# Altium PCB PowerBoard.PcbDoc (part 1 of 2)
Units mm, origin at the board's own origin, x right, y up, seen from the top; angles counter-clockwise.
Board outline 106.25 x 146.25 mm, 4 copper layers (Top Layer, Signal Layer 1, Signal Layer 2, Bottom Layer), stack 2.22 mm thick; 73 components, 20 nets, 353 pads, 2185 vias.
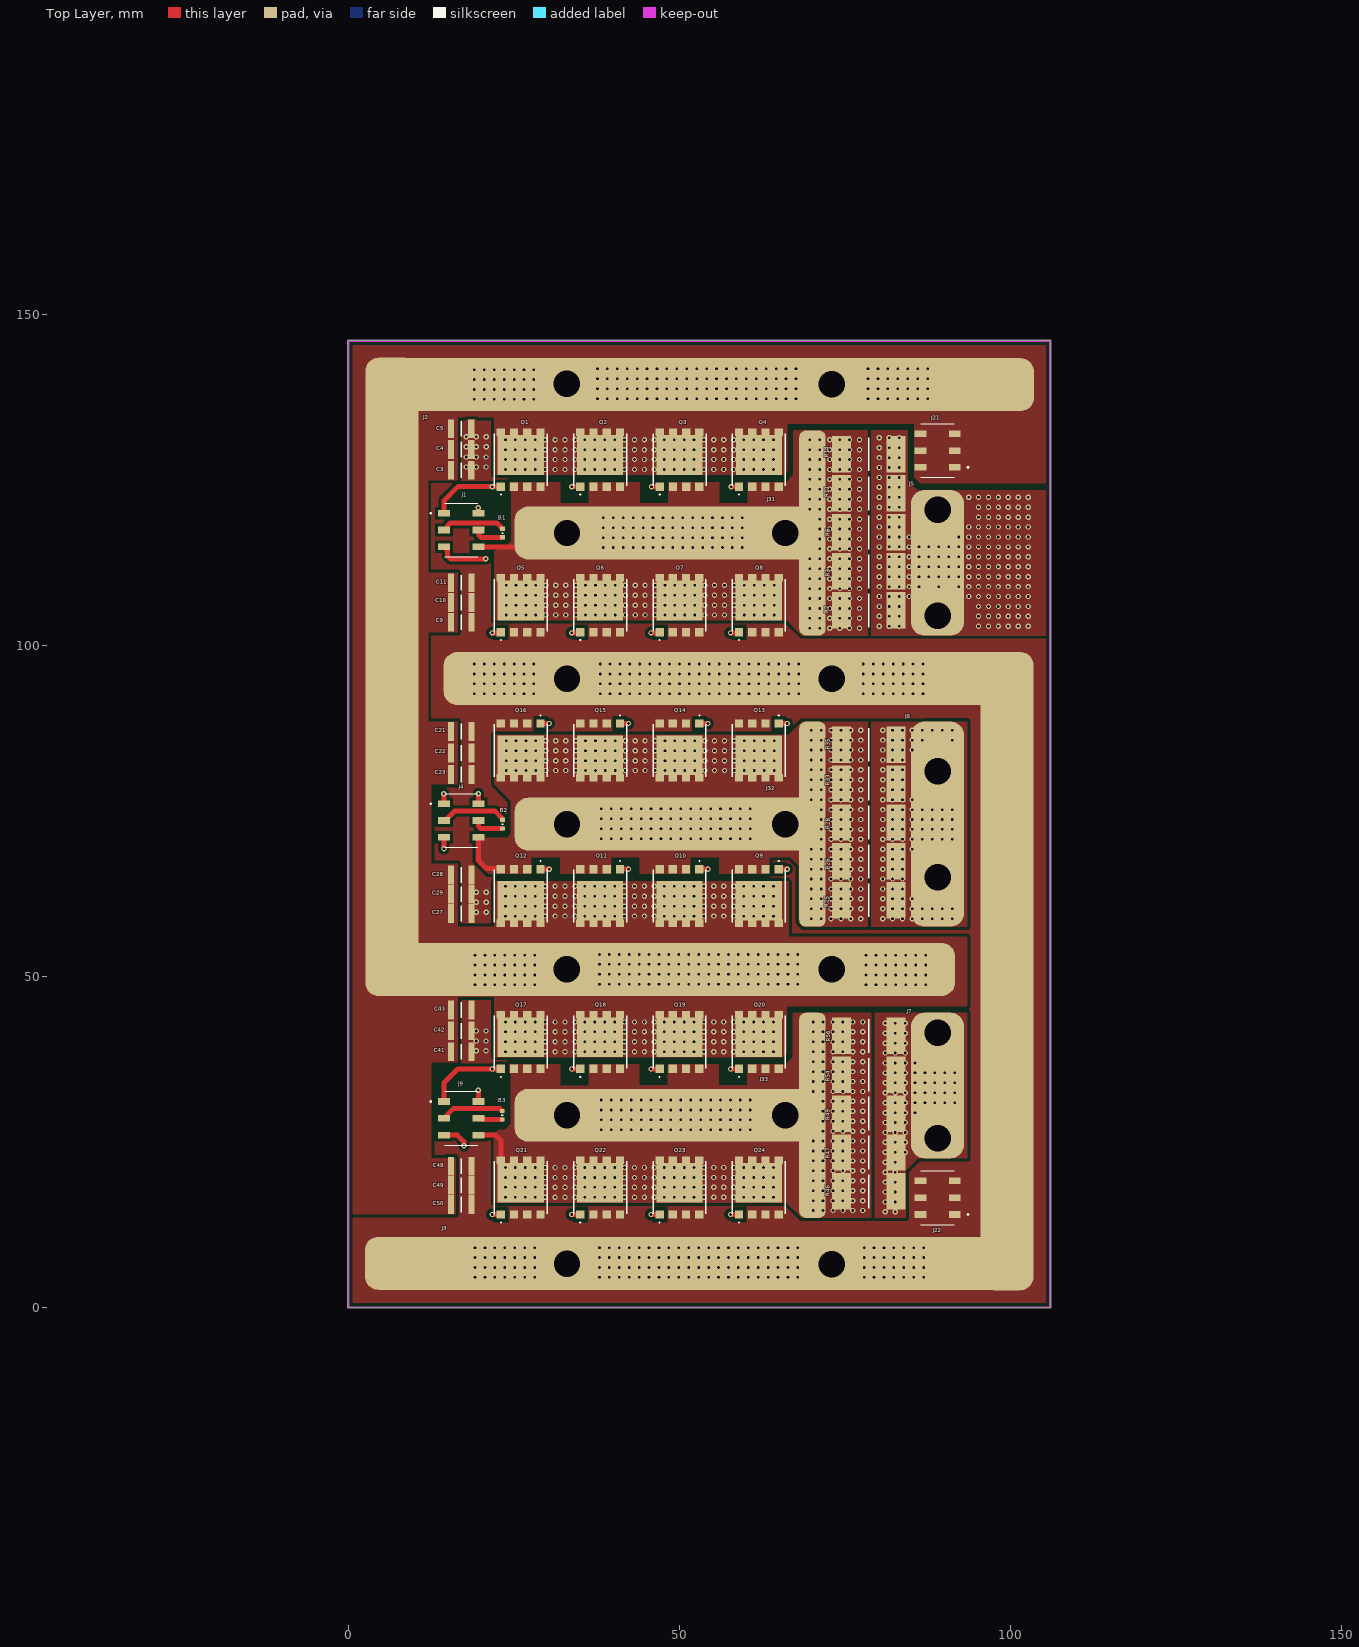
[diagram p0: Top Layer view]
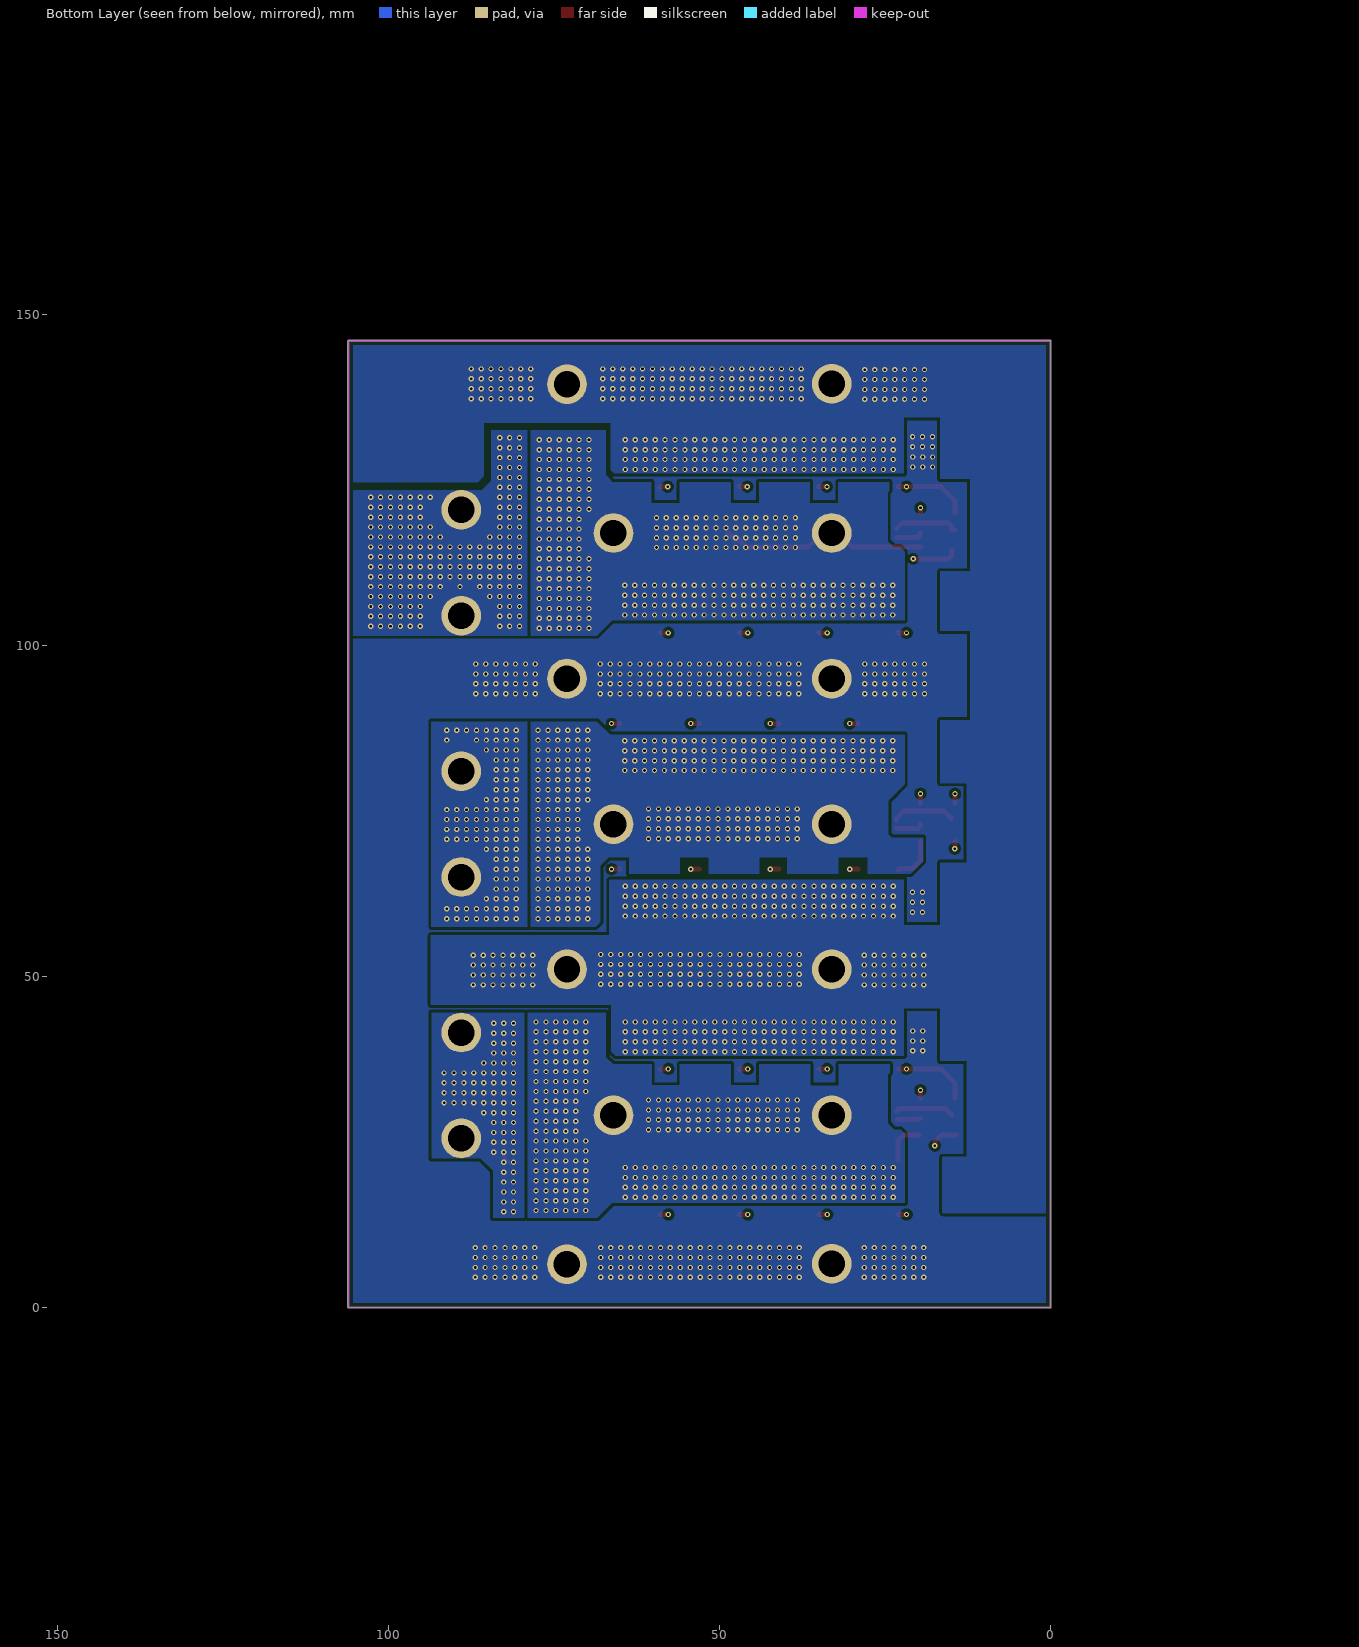
[diagram p1: Bottom Layer view, seen from below]
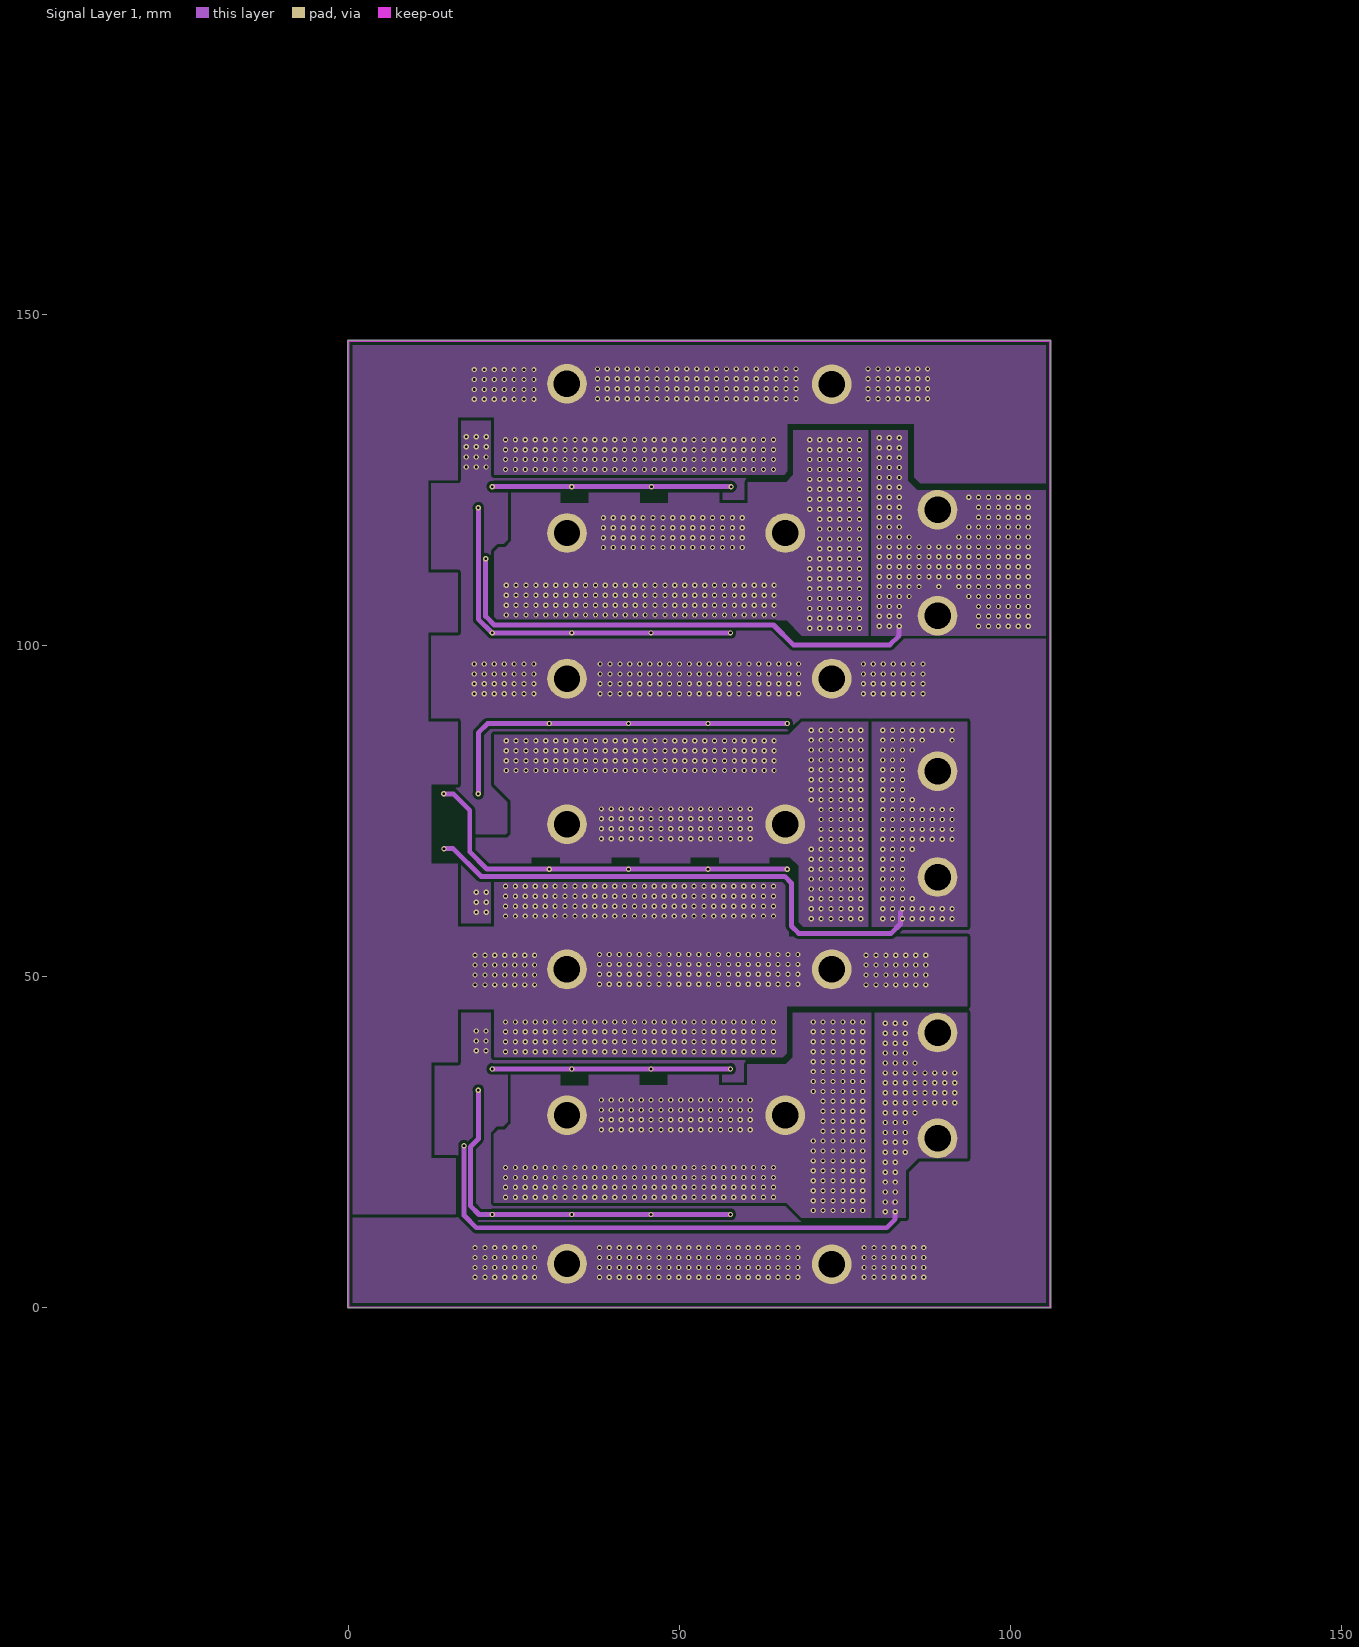
[diagram p2: Signal Layer 1]
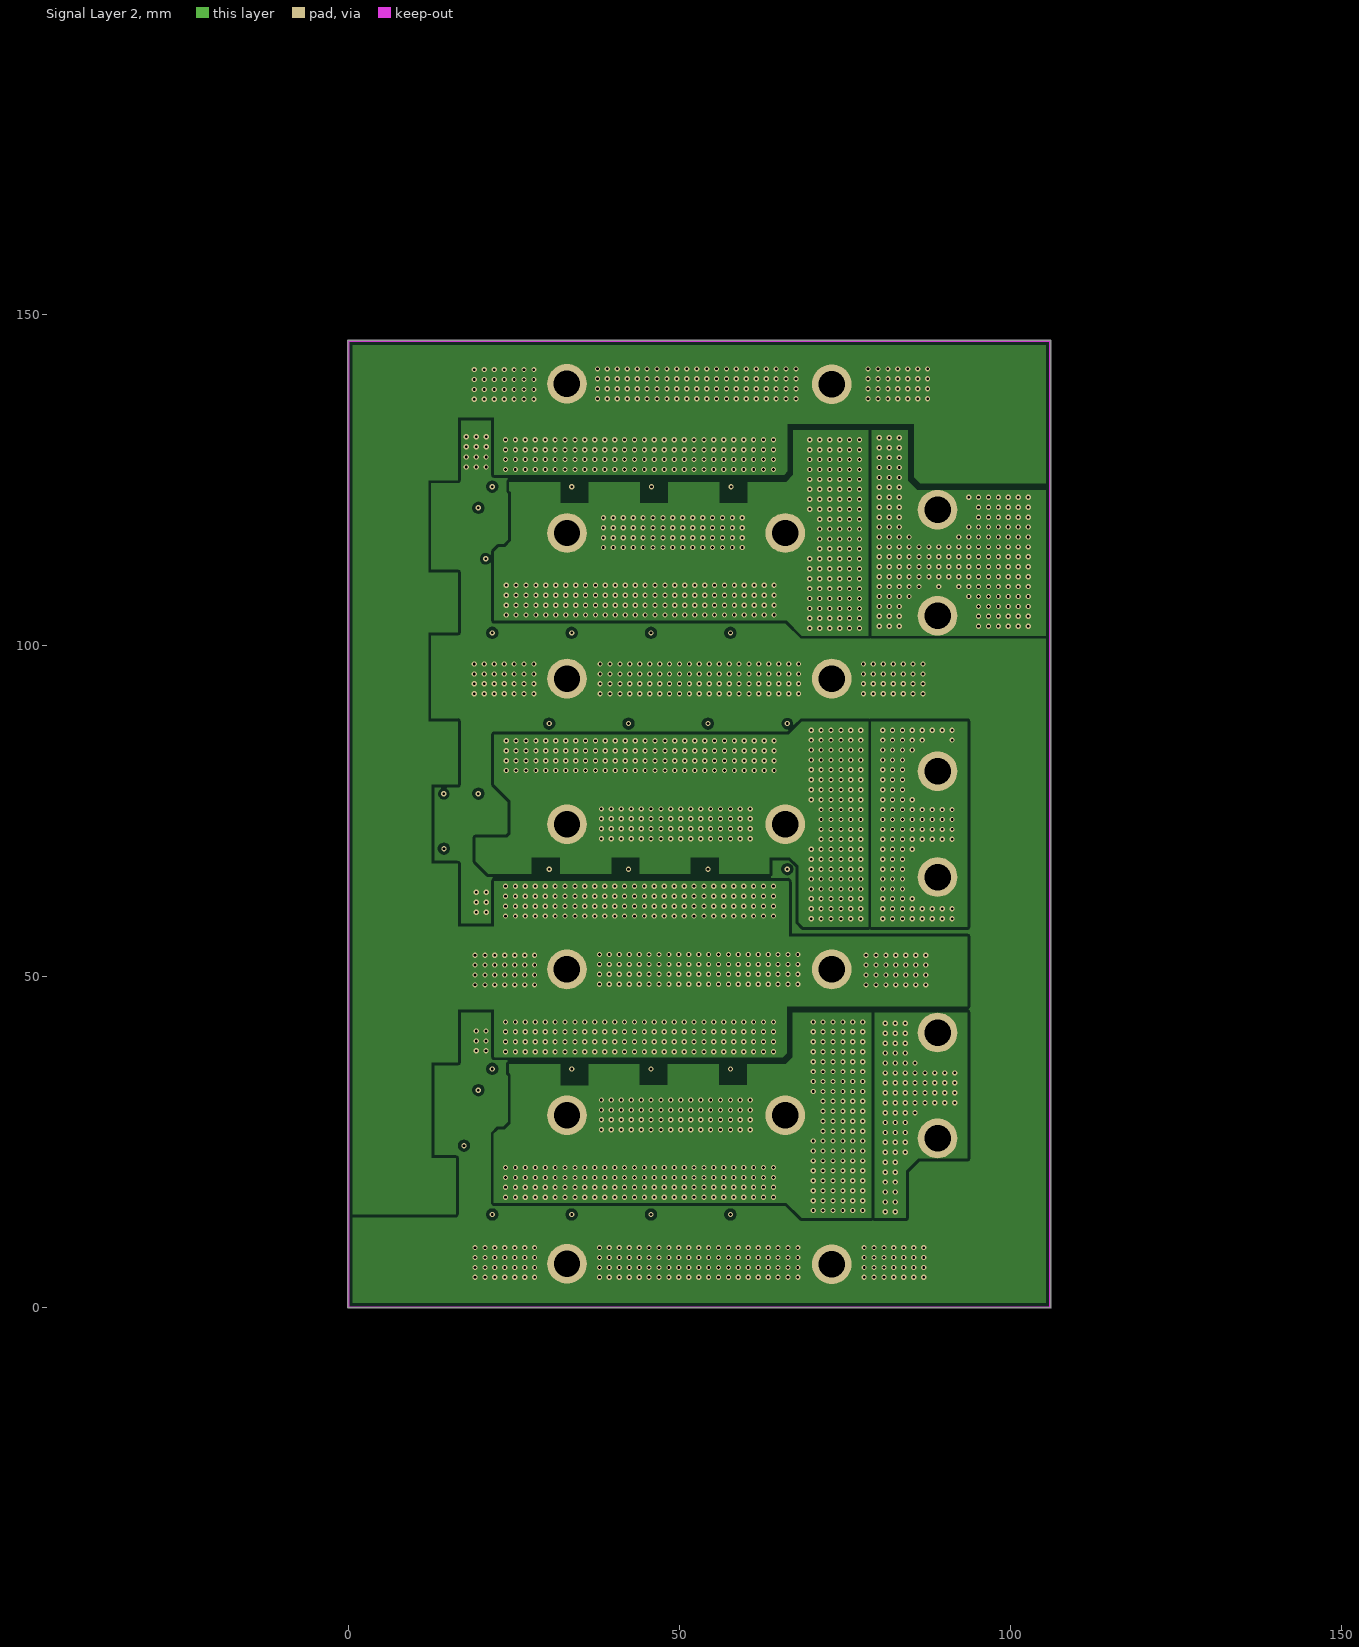
[diagram p3: Signal Layer 2]
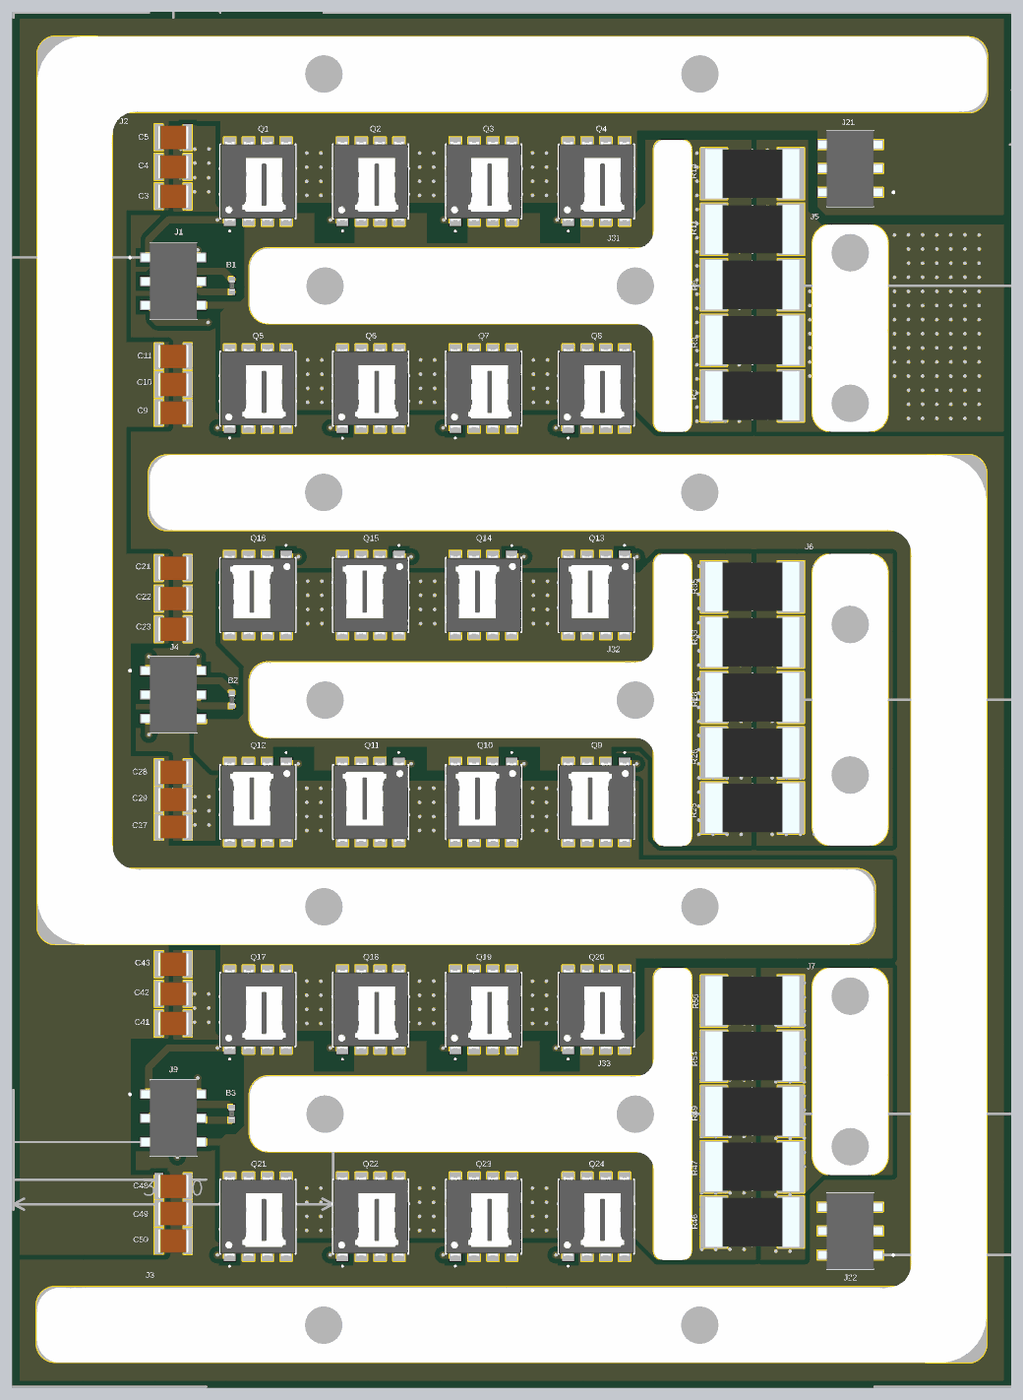
[diagram p5: 3D render of the assembled board from above, using the file's embedded part models]

## Layer stack, top to bottom
Top Solder: solder mask 0.025, Solder Resist, Dk 3.5
Top Layer: signal copper 0.07
Dielectric 2: core 0.254, Dk 4.2
Signal Layer 1: signal copper 0.036
Dielectric 4: core 1.5, Dk 4.2
Signal Layer 2: signal copper 0.036
Dielectric 3: core 0.254, Dk 4.2
Bottom Layer: signal copper 0.07
Bottom Solder: solder mask 0.025, Solder Resist, Dk 3.5

## Board outline
0,-0.127 cw(c0,0) -0.127,0 -0.127,146 cw(c0,146) 0,146.127 106,146.127 cw(c106,146) 106.127,146 106.127,145.998 ccw(c106,146) 106.127,146 106.127,145.998 106.127,0 cw(c106,0) 106,-0.127

## Design rules (kind name [scope] priority, off if disabled: settings)
AssemblyTestPointUsage AssemblyTestPointUsage_1 [All] p2:
AssemblyTestpoint AssemblyTestpoint_1 [All] p1: testpointundercomponent=TRUE minsize=1.016 maxsize=2.54 preferedsize=1.524 minholesize=0 maxholesize=1.016 preferedholesize=0.813 testpointgrid=0.025 usegrid=TRUE gridtolerance=0 allowsidetop=TRUE allowsidebottom=TRUE
Clearance Clearance_1 [All] p1: gap=0.5 ignorepadtopadclearanceinfootprint=FALSE except(0: Arc-Hole Track-Hole SMDPad-Hole THPad-Hole Via-Hole Fill-Hole Poly-Hole Region-Hole Text-Hole; 0.2: Arc-Arc Arc-Track Arc-SMDPad Arc-THPad Arc-Via Track-Track Track-SMDPad Track-THPad Track-Via SMDPad-SMDPad SMDPad-THPad SMDPad-Via THPad-THPad THPad-Via Via-Via)
ComponentClearance ComponentClearance_1 [All] p1: gap=0.2 collisioncheckmode=3 verticalgap=0.2 showdistances=TRUE
DiffPairsRouting DiffPairsRouting_1 [All] p1: maxlimit=0.254 minlimit=0.254 mostfreqgap=0.254 substack1={0391787D-B3DB-4B16-B312-97C439599AB4} toplayer_{0391787d-b3db-4b16-b312-97c439599ab4}_minwidth=0.381 toplayer_{0391787d-b3db-4b16-b312-97c439599ab4}_maxwidth=0.381 toplayer_{0391787d-b3db-4b16-b312-97c439599ab4}_prefwidth=0.381 midlayer1_{0391787d-b3db-4b16-b312-97c439599ab4}_minwidth=0.381 midlayer1_{0391787d-b3db-4b16-b312-97c439599ab4}_maxwidth=0.381 midlayer1_{0391787d-b3db-4b16-b312-97c439599ab4}_prefwidth=0.381 midlayer2_{0391787d-b3db-4b16-b312-97c439599ab4}_minwidth=0.381 midlayer2_{0391787d-b3db-4b16-b312-97c439599ab4}_maxwidth=0.381 midlayer2_{0391787d-b3db-4b16-b312-97c439599ab4}_prefwidth=0.381 bottomlayer_{0391787d-b3db-4b16-b312-97c439599ab4}_minwidth=0.381 bottomlayer_{0391787d-b3db-4b16-b312-97c439599ab4}_maxwidth=0.381 bottomlayer_{0391787d-b3db-4b16-b312-97c439599ab4}_prefwidth=0.381 substack2={0E55BCC6-0461-4BB8-A6DB-68FAAC3CF03A} toplayer_{0e55bcc6-0461-4bb8-a6db-68faac3cf03a}_minwidth=0.381 toplayer_{0e55bcc6-0461-4bb8-a6db-68faac3cf03a}_maxwidth=0.381 toplayer_{0e55bcc6-0461-4bb8-a6db-68faac3cf03a}_prefwidth=0.381 midlayer1_{0e55bcc6-0461-4bb8-a6db-68faac3cf03a}_minwidth=0.381 midlayer1_{0e55bcc6-0461-4bb8-a6db-68faac3cf03a}_maxwidth=0.381 midlayer1_{0e55bcc6-0461-4bb8-a6db-68faac3cf03a}_prefwidth=0.381 midlayer2_{0e55bcc6-0461-4bb8-a6db-68faac3cf03a}_minwidth=0.381 midlayer2_{0e55bcc6-0461-4bb8-a6db-68faac3cf03a}_maxwidth=0.381 midlayer2_{0e55bcc6-0461-4bb8-a6db-68faac3cf03a}_prefwidth=0.381 bottomlayer_{0e55bcc6-0461-4bb8-a6db-68faac3cf03a}_minwidth=0.381 bottomlayer_{0e55bcc6-0461-4bb8-a6db-68faac3cf03a}_maxwidth=0.381 bottomlayer_{0e55bcc6-0461-4bb8-a6db-68faac3cf03a}_prefwidth=0.381 substack3={7F91D735-8F98-4998-8FBE-C2B075826548} toplayer_{7f91d735-8f98-4998-8fbe-c2b075826548}_minwidth=0.381 toplayer_{7f91d735-8f98-4998-8fbe-c2b075826548}_maxwidth=0.381 toplayer_{7f91d735-8f98-4998-8fbe-c2b075826548}_prefwidth=0.381 midlayer1_{7f91d735-8f98-4998-8fbe-c2b075826548}_minwidth=0.381 midlayer1_{7f91d735-8f98-4998-8fbe-c2b075826548}_maxwidth=0.381 midlayer1_{7f91d735-8f98-4998-8fbe-c2b075826548}_prefwidth=0.381 midlayer2_{7f91d735-8f98-4998-8fbe-c2b075826548}_minwidth=0.381 midlayer2_{7f91d735-8f98-4998-8fbe-c2b075826548}_maxwidth=0.381 midlayer2_{7f91d735-8f98-4998-8fbe-c2b075826548}_prefwidth=0.381 bottomlayer_{7f91d735-8f98-4998-8fbe-c2b075826548}_minwidth=0.381 bottomlayer_{7f91d735-8f98-4998-8fbe-c2b075826548}_maxwidth=0.381 bottomlayer_{7f91d735-8f98-4998-8fbe-c2b075826548}_prefwidth=0.381 substack4={4ED4D01E-40BF-4D50-BA5A-F23A5EC9E761} toplayer_{4ed4d01e-40bf-4d50-ba5a-f23a5ec9e761}_minwidth=0.381 toplayer_{4ed4d01e-40bf-4d50-ba5a-f23a5ec9e761}_maxwidth=0.381 toplayer_{4ed4d01e-40bf-4d50-ba5a-f23a5ec9e761}_prefwidth=0.381 midlayer1_{4ed4d01e-40bf-4d50-ba5a-f23a5ec9e761}_minwidth=0.381 midlayer1_{4ed4d01e-40bf-4d50-ba5a-f23a5ec9e761}_maxwidth=0.381 midlayer1_{4ed4d01e-40bf-4d50-ba5a-f23a5ec9e761}_prefwidth=0.381 midlayer2_{4ed4d01e-40bf-4d50-ba5a-f23a5ec9e761}_minwidth=0.381 midlayer2_{4ed4d01e-40bf-4d50-ba5a-f23a5ec9e761}_maxwidth=0.381 midlayer2_{4ed4d01e-40bf-4d50-ba5a-f23a5ec9e761}_prefwidth=0.381 bottomlayer_{4ed4d01e-40bf-4d50-ba5a-f23a5ec9e761}_minwidth=0.381 bottomlayer_{4ed4d01e-40bf-4d50-ba5a-f23a5ec9e761}_maxwidth=0.381 bottomlayer_{4ed4d01e-40bf-4d50-ba5a-f23a5ec9e761}_prefwidth=0.381 substack5={57BA5FAC-A096-47A8-A9C3-28502E285703} toplayer_{57ba5fac-a096-47a8-a9c3-28502e285703}_minwidth=0.381 toplayer_{57ba5fac-a096-47a8-a9c3-28502e285703}_maxwidth=0.381 toplayer_{57ba5fac-a096-47a8-a9c3-28502e285703}_prefwidth=0.381 midlayer1_{57ba5fac-a096-47a8-a9c3-28502e285703}_minwidth=0.381 midlayer1_{57ba5fac-a096-47a8-a9c3-28502e285703}_maxwidth=0.381 midlayer1_{57ba5fac-a096-47a8-a9c3-28502e285703}_prefwidth=0.381 midlayer2_{57ba5fac-a096-47a8-a9c3-28502e285703}_minwidth=0.381 midlayer2_{57ba5fac-a096-47a8-a9c3-28502e285703}_maxwidth=0.381 midlayer2_{57ba5fac-a096-47a8-a9c3-28502e285703}_prefwidth=0.381 bottomlayer_{57ba5fac-a096-47a8-a9c3-28502e285703}_minwidth=0.381 bottomlayer_{57ba5fac-a096-47a8-a9c3-28502e285703}_maxwidth=0.381 bottomlayer_{57ba5fac-a096-47a8-a9c3-28502e285703}_prefwidth=0.381 toplayer_minwidth=0.381 toplayer_maxwidth=0.381 toplayer_prefwidth=0.381 midlayer1_minwidth=0.381 midlayer1_maxwidth=0.381 midlayer1_prefwidth=0.381 midlayer2_minwidth=0.381 midlayer2_maxwidth=0.381 midlayer2_prefwidth=0.381 bottomlayer_minwidth=0.381 bottomlayer_maxwidth=0.381 bottomlayer_prefwidth=0.381 substack6={B351C19E-D50C-4F2F-B5BB-791B69F230FF} toplayer_{b351c19e-d50c-4f2f-b5bb-791b69f230ff}_minwidth=0.381 toplayer_{b351c19e-d50c-4f2f-b5bb-791b69f230ff}_maxwidth=0.381 toplayer_{b351c19e-d50c-4f2f-b5bb-791b69f230ff}_prefwidth=0.381 midlayer1_{b351c19e-d50c-4f2f-b5bb-791b69f230ff}_minwidth=0.381 midlayer1_{b351c19e-d50c-4f2f-b5bb-791b69f230ff}_maxwidth=0.381 midlayer1_{b351c19e-d50c-4f2f-b5bb-791b69f230ff}_prefwidth=0.381 midlayer2_{b351c19e-d50c-4f2f-b5bb-791b69f230ff}_minwidth=0.381 midlayer2_{b351c19e-d50c-4f2f-b5bb-791b69f230ff}_maxwidth=0.381 midlayer2_{b351c19e-d50c-4f2f-b5bb-791b69f230ff}_prefwidth=0.381 bottomlayer_{b351c19e-d50c-4f2f-b5bb-791b69f230ff}_minwidth=0.381 bottomlayer_{b351c19e-d50c-4f2f-b5bb-791b69f230ff}_maxwidth=0.381 bottomlayer_{b351c19e-d50c-4f2f-b5bb-791b69f230ff}_prefwidth=0.381 substack7={2F1B6B62-C7FD-47FC-965D-ED7560D8E9E8} toplayer_{2f1b6b62-c7fd-47fc-965d-ed7560d8e9e8}_minwidth=0.381 toplayer_{2f1b6b62-c7fd-47fc-965d-ed7560d8e9e8}_maxwidth=0.381 toplayer_{2f1b6b62-c7fd-47fc-965d-ed7560d8e9e8}_prefwidth=0.381 midlayer1_{2f1b6b62-c7fd-47fc-965d-ed7560d8e9e8}_minwidth=0.381 midlayer1_{2f1b6b62-c7fd-47fc-965d-ed7560d8e9e8}_maxwidth=0.381 midlayer1_{2f1b6b62-c7fd-47fc-965d-ed7560d8e9e8}_prefwidth=0.381 midlayer2_{2f1b6b62-c7fd-47fc-965d-ed7560d8e9e8}_minwidth=0.381 midlayer2_{2f1b6b62-c7fd-47fc-965d-ed7560d8e9e8}_maxwidth=0.381 midlayer2_{2f1b6b62-c7fd-47fc-965d-ed7560d8e9e8}_prefwidth=0.381 bottomlayer_{2f1b6b62-c7fd-47fc-965d-ed7560d8e9e8}_minwidth=0.381 bottomlayer_{2f1b6b62-c7fd-47fc-965d-ed7560d8e9e8}_maxwidth=0.381 bottomlayer_{2f1b6b62-c7fd-47fc-965d-ed7560d8e9e8}_prefwidth=0.381 substack8={A0CE5E7A-17C9-422A-884C-87F0A86ADDD9} toplayer_{a0ce5e7a-17c9-422a-884c-87f0a86addd9}_minwidth=0.381 toplayer_{a0ce5e7a-17c9-422a-884c-87f0a86addd9}_maxwidth=0.381 toplayer_{a0ce5e7a-17c9-422a-884c-87f0a86addd9}_prefwidth=0.381 midlayer1_{a0ce5e7a-17c9-422a-884c-87f0a86addd9}_minwidth=0.381 midlayer1_{a0ce5e7a-17c9-422a-884c-87f0a86addd9}_maxwidth=0.381 midlayer1_{a0ce5e7a-17c9-422a-884c-87f0a86addd9}_prefwidth=0.381 midlayer2_{a0ce5e7a-17c9-422a-884c-87f0a86addd9}_minwidth=0.381 midlayer2_{a0ce5e7a-17c9-422a-884c-87f0a86addd9}_maxwidth=0.381 midlayer2_{a0ce5e7a-17c9-422a-884c-87f0a86addd9}_prefwidth=0.381 bottomlayer_{a0ce5e7a-17c9-422a-884c-87f0a86addd9}_minwidth=0.381 bottomlayer_{a0ce5e7a-17c9-422a-884c-87f0a86addd9}_maxwidth=0.381 bottomlayer_{a0ce5e7a-17c9-422a-884c-87f0a86addd9}_prefwidth=0.381 maxuncoupledlength=12.7
FabricationTestPointUsage FabricationTestPointUsage_1 [All] p1: valid=0 allowmultiple=FALSE
FabricationTestpoint FabricationTestpoint_1 [All] p1: side=3 testpointundercomponent=TRUE minsize=1.016 maxsize=2.54 preferedsize=1.524 minholesize=0 maxholesize=1.016 preferedholesize=0.813 testpointgrid=0.025 allowsidetop=TRUE allowsidebottom=TRUE usegrid=TRUE gridtolerance=0
FanoutControl Fanout_BGA_1 [IsBGA] p1: bgadir=Out bgaviamode=Centered fanoutstyle=Auto fanoutdirection=Alternating viagrid=0.025 // Fanout_BGA (Default Rule)
FanoutControl Fanout_LCC_1 [IsLCC] p2: bgadir=Out bgaviamode=Centered fanoutstyle=Auto fanoutdirection=Alternating viagrid=0.025 // Fanout_LCC (Default Rule)
FanoutControl Fanout_SOIC_1 [IsSOIC] p3: bgadir=Out bgaviamode=Centered fanoutstyle=Auto fanoutdirection=Alternating viagrid=0.025 // Fanout_SOIC (Default Rule)
FanoutControl Fanout_Small_1 [(CompPinCount < 5)] p4: bgadir=Out bgaviamode=Centered fanoutstyle=Auto fanoutdirection=OutThenIn viagrid=0.025 // Fanout_Small (Default Rule)
FanoutControl Fanout_Default_1 [All] p5: bgadir=Out bgaviamode=Centered fanoutstyle=Auto fanoutdirection=Alternating viagrid=0.025 // Fanout_Default (Default Rule)
Height Height_1 [All] p1: minheight=0 maxheight=25.4 prefheight=12.7
HoleSize HoleSize_1 [All] p1: absolutevalues=TRUE maxlimit=5 minlimit=0.3 maxpercent=80.000 minpercent=20.000
HoleToHoleClearance HoleToHoleClearance_1 [All] p1: gap=0.254 allowstackedmicrovias=TRUE
LayerPairs LayerPairs_1 [All] p1: enforce=TRUE
MinimumSolderMaskSliver MinimumSolderMaskSliver_1 [All] p1: minsoldermaskwidth=0.1
NetAntennae NetAntennae_1 [InNetClass('VIN')] p1: netantennaetolerance=0
PasteMaskExpansion PasteMaskExpansion_1 [All] p1: expansion=0
PlaneClearance PlaneClearance_1 [All] p1: clearance=0.508
PlaneConnect PlaneConnect_1 [All] p1: planeconnectstyle=Relief reliefexpansion=0.508 reliefentries=4 reliefconductorwidth=0.254 reliefairgap=0.254
PolygonConnect PolygonConnect_1 [All] p1: connectstyle=Direct reliefconductorwidth=0.254 reliefentries=4 polygonreliefangle="90 Angle" airgapwidth=0.254
RoutingCorners RoutingCorners_1 [All] p1: cornerstyle=45-Degree minsetback=2.54 maxsetback=2.54
RoutingLayers RoutingLayers_1 [All] p1: top layer_v5=TRUE mid layer 1_v5=TRUE mid layer 2_v5=TRUE bottom layer_v5=TRUE
RoutingPriority RoutingPriority_1 [All] p1: routingpriority=0
RoutingTopology RoutingTopology_1 [All] p1: topology=Shortest
RoutingVias RoutingVias_1 [All] p1: holewidth=0.4 width=0.8 viastyle="Through Hole" minholewidth=0.3 minwidth=0.6 maxholewidth=5 maxwidth=10
ShortCircuit ShortCircuit_1 [All] p1: allowed=FALSE
SilkToBoardRegionClearance SilkToBoardRegionClearance_1 [All] p2:
SilkToSilkClearance SilkToSilkClearance_1 [All] p1: silktosilkclearance=0
SilkToSolderMaskClearance SilkToSolderMaskClearance_1 [IsPad] p1: minsilkscreentomaskgap=0 clearancetoexposedcopper=TRUE
SolderMaskExpansion SolderMaskExpansion_1 [All] p1: expansion=0.102 istentingtop=FALSE
UnRoutedNet UnRoutedNet_1 [All] p1:
UnpouredPolygon UnpouredPolygon_1 [All] p1:
Width Width_1 [All] p1: maxlimit=3.048 minlimit=0.2 preferedwidth=0.254 substack1={0391787D-B3DB-4B16-B312-97C439599AB4} substack2={0E55BCC6-0461-4BB8-A6DB-68FAAC3CF03A} substack3={7F91D735-8F98-4998-8FBE-C2B075826548} substack4={4ED4D01E-40BF-4D50-BA5A-F23A5EC9E761} substack5={57BA5FAC-A096-47A8-A9C3-28502E285703} substack6={B351C19E-D50C-4F2F-B5BB-791B69F230FF} substack7={2F1B6B62-C7FD-47FC-965D-ED7560D8E9E8} substack8={A0CE5E7A-17C9-422A-884C-87F0A86ADDD9}
2 further rules are at their usual default settings.

## Components (designator, comment, footprint, x,y, rotation, side; value= is the part's Value field where it differs from the comment)
B1 "NTCS0402E3103GL1T" THRMC1005X65N 23.25,117 r270 top
B2 "NTCS0402E3103GL1T" THRMC1005X65N 23.25,73 r270 top
B3 "NTCS0402E3103GL1T" THRMC1005X65N 23.2,29 r270 top
C3 "10uF 100V" CAPC3225X230N 16.992,126.5 r180 top
C4 "10uF 100V" CAPC3225X230N 16.992,129.628 r180 top
C5 "10uF 100V" CAPC3225X230N 16.992,132.756 r180 top
C9 "10uF 100V" CAPC3225X230N 17,103.5 r0 top
C10 "10uF 100V" CAPC3225X230N 17,106.5 r0 top
C11 "10uF 100V" CAPC3225X230N 17,109.5 r0 top
C21 "10uF 100V" CAPC3225X230N 17,87 r180 top
C22 "10uF 100V" CAPC3225X230N 17,83.75 r180 top
C23 "10uF 100V" CAPC3225X230N 17,80.5 r180 top
C27 "10uF 100V" CAPC3225X230N 17,59.5 r0 top
C28 "10uF 100V" CAPC3225X230N 17,65.3 r0 top
C29 "10uF 100V" CAPC3225X230N 17,62.4 r0 top
C41 "10uF 100V" CAPC3225X230N 17,38.6 r180 top
C42 "10uF 100V" CAPC3225X230N 17,41.75 r180 top
C43 "10uF 100V" CAPC3225X230N 17,44.9 r180 top
C48 "10uF 100V" CAPC3225X230N 17,21.3 r0 top
C49 "10uF 100V" CAPC3225X230N 17,18.4 r0 top
C50 "10uF 100V" CAPC3225X230N 17,15.5 r0 top
J1 "PHASE_U" 61030621821 17,117.46 r270 top value=61030621821
J2 "74651194R" COPPER_CON1 7.52,92.75 r0 top locked
J3 "74651194R" COPPER_CON1 98.5,53.289 r180 top locked
J4 "PHASE_V" 61030621821 17,73.54 r270 top value=61030621821
J5 "74651194R" COPPER_CON2 89,112.5 r180 top locked
J6 "74651194R" COPPER_CON3 93,73 r0 top locked
J7 "74651194R" COPPER_CON2 89,33.5 r180 top locked
J9 "PHASE_W" 61030621821 17,28.54 r270 top value=61030621821
J21 "VIN+" 61030621821 89,129.46 r90 top value=61030621821
J22 "VIN-" 61030621821 89,16.54 r90 top value=61030621821
J31 "" COPPER_BUS 49.3,117.4 r0 top locked value=74651194R
J32 "" COPPER_BUS 49.3,73.4 r0 top locked value=74651194R
J33 "" COPPER_BUS 49.3,29.4 r0 top locked value=74651194R
Q1 "NTMSC002N10MCTXG" NTMSC002N10MCTXG 26.005,128.92 r90 top
Q2 "NTMSC002N10MCTXG" NTMSC002N10MCTXG 38,128.92 r90 top
Q3 "NTMSC002N10MCTXG" NTMSC002N10MCTXG 50.007,128.92 r90 top
Q4 "NTMSC002N10MCTXG" NTMSC002N10MCTXG 62.007,128.92 r90 top
Q5 "NTMSC002N10MCTXG" NTMSC002N10MCTXG 26,106.915 r90 top
Q6 "NTMSC002N10MCTXG" NTMSC002N10MCTXG 38,106.915 r90 top
Q7 "NTMSC002N10MCTXG" NTMSC002N10MCTXG 50,106.915 r90 top
Q8 "NTMSC002N10MCTXG" NTMSC002N10MCTXG 62,106.915 r90 top
Q9 "NTMSC002N10MCTXG" NTMSC002N10MCTXG 62,61.295 r270 top
Q10 "NTMSC002N10MCTXG" NTMSC002N10MCTXG 50,61.295 r270 top
Q11 "NTMSC002N10MCTXG" NTMSC002N10MCTXG 38,61.295 r270 top
Q12 "NTMSC002N10MCTXG" NTMSC002N10MCTXG 26,61.295 r270 top
Q13 "NTMSC002N10MCTXG" NTMSC002N10MCTXG 62,83.295 r270 top
Q14 "NTMSC002N10MCTXG" NTMSC002N10MCTXG 50,83.295 r270 top
Q15 "NTMSC002N10MCTXG" NTMSC002N10MCTXG 38,83.295 r270 top
Q16 "NTMSC002N10MCTXG" NTMSC002N10MCTXG 26,83.295 r270 top
Q17 "NTMSC002N10MCTXG" NTMSC002N10MCTXG 26,40.915 r90 top
Q18 "NTMSC002N10MCTXG" NTMSC002N10MCTXG 38,40.915 r90 top
Q19 "NTMSC002N10MCTXG" NTMSC002N10MCTXG 50,40.915 r90 top
Q20 "NTMSC002N10MCTXG" NTMSC002N10MCTXG 62,40.915 r90 top
Q21 "NTMSC002N10MCTXG" NTMSC002N10MCTXG 26,18.915 r90 top
Q22 "NTMSC002N10MCTXG" NTMSC002N10MCTXG 38,18.915 r90 top
Q23 "NTMSC002N10MCTXG" NTMSC002N10MCTXG 50,18.915 r90 top
Q24 "NTMSC002N10MCTXG" NTMSC002N10MCTXG 62,18.915 r90 top
R2 "0.5mR/9W" RESC10052X137N 78.6,105.3 r180 top value="0.5ohm 9W"
R3 "0.5mR/9W" RESC10052X137N 78.6,111.2 r180 top value="0.5ohm 9W"
R6 "0.5mR/9W" RESC10052X137N 78.6,117.1 r180 top value="0.5ohm 9W"
R11 "0.5mR/9W" RESC10052X137N 78.6,123 r180 top value="0.5ohm 9W"
R14 "0.5mR/9W" RESC10052X137N 78.6,128.9 r180 top value="0.5ohm 9W"
R25 "0.5mR/9W" RESC10052X137N 78.6,61.5 r180 top value="0.5ohm 9W"
R26 "0.5mR/9W" RESC10052X137N 78.6,67.375 r180 top value="0.5ohm 9W"
R28 "0.5mR/9W" RESC10052X137N 78.6,73.25 r180 top value="0.5ohm 9W"
R33 "0.5mR/9W" RESC10052X137N 78.6,79.125 r180 top value="0.5ohm 9W"
R35 "0.5mR/9W" RESC10052X137N 78.6,85 r180 top value="0.5ohm 9W"
R46 "0.5mR/9W" RESC10052X137N 78.6,17.5 r180 top value="0.5ohm 9W"
R47 "0.5mR/9W" RESC10052X137N 78.6,23.375 r180 top value="0.5ohm 9W"
R49 "0.5mR/9W" RESC10052X137N 78.6,29.25 r180 top value="0.5ohm 9W"
R54 "0.5mR/9W" RESC10052X137N 78.6,35.125 r180 top value="0.5ohm 9W"
R56 "0.5mR/9W" RESC10052X137N 78.6,41 r180 top value="0.5ohm 9W"

## Footprints (in the part's own frame and the unit in brackets; to place one, negate y for a bottom-side part, rotate by r counter-clockwise, add the part's x,y. Pads: shape width x height; smd on the part's side, far side on the other; paste and mask are expansions set on the pad)
61030621821 [mm]
  rect 1x1.8 smd: 1(-2.54,-2.6) 2(-2.54,2.6) 3(0,-2.6) 4(0,2.6) 5(2.54,-2.6) 6(2.54,2.6)
  silkscreen extent -4.06,-4.7 4.06,2.5, body extent -4.06,-3.4 4.06,3.4, height 7.85
CAPC3225X230N [mm]
  rect 0.92x2.82 smd: 1(-1.54,0) 2(1.54,0)
  silkscreen extent 0,-1.15 0,1.15, body extent -1.6,-1.25 1.6,1.25, height 2.47
COPPER_BUS [mm]
  round 6 hole 4: 1(-16.3,-0.4) 1(16.7,-0.4)
  rrect50% 47x8 smd: 1(-0.7,-0.4)
  rrect50% 4x31 smd: 1(20.8,-0.4)
  body extent -24.16,-15.94 22.84,15.06, height 5
COPPER_CON1 [mm]
  rrect50% 8x96.5 smd: 1(-1,2.5)
  round 6 hole 4: 1(25.475,-41.708) 1(25.475,46.789) 1(65.5,-41.708) 1(65.5,46.75)
  rrect50% 89x8 smd: 1(39.631,-41.708)
  rrect50% 101x8 smd: 1(45.555,46.666)
  body extent -5,-45.75 96,50.75, height 20.19
COPPER_CON2 [mm]
  round 6 hole 4: 1(0,8) 1(0,-8)
  rrect50% 8x22 smd: 1(0,0)
  body extent -4,-11 4,11, height 20
COPPER_CON3 [mm]
  round 6 hole 4: 1(-4,-8) 1(-4,8)
  rrect50% 8x31 smd: 1(-4,0)
  body extent -8,-15.5 0,15.5, height 20
NTMSC002N10MCTXG [mm]
  rect 6x7 smd: DRAIN(-0.12,0)
  rect 1.15x1.25 smd: DRAIN(3.295,-3) DRAIN(3.295,-1) DRAIN(3.295,1) DRAIN(3.295,3)
  rect 1.28x1.25 smd: GATE(-4.915,3) SOURCE(-4.915,-3) SOURCE(-4.915,-1) SOURCE(-4.915,1)
  silkscreen extent -6.16,-4 3.11,4, body extent -5.03,-4.15 3.37,4.15, height 1.02
RESC10052X137N [mm] "RESISTOR SMD 0603"
  rect 2.85x5.5 smd: 1(-4.1,0) 2(4.1,0)
  silkscreen extent 0,-2.52 0,2.52, body extent -5,-2.63 5,2.63, height 1.37
THRMC1005X65N [mm]
  rect 0.65x0.7 smd: 1(-0.65,0) 2(0.65,0)
  silkscreen extent 0,-0.15 0,0.15, body extent -0.5,-0.25 0.5,0.25, height 0.65

## Part data
B1 B2 B3: "NTC Thermistors 10Kohms 2% AEC-Q200", Manufacturer=Vishay, Supplier Part Number=594-NTCS402E3103GL1T, Manufacturer Part Number=NTCS0402E3103GL1T, Price=0.47, Supplier=Mouser
C3 C4 C5 C9 C10 C11 C21 C22 C23 C27 C28 C29 C41 C42 C43 C48 C49 C50: library part "10uF ± 10% 100V", "Multilayer Ceramic Capacitors MLCC - SMD/SMT 1210 100VDC 10uF 10% X7R", Manufacturer=TDK, Manufacturer Part Number=C3225X7R2A106K250AC, Supplier Part Number=810-C3225X7R2A106K25, Price=1.42, Supplier=Mouser
J1 J4 J9 J21 J22: library part "Female Header 6 Pin_1", "Headers & Wire Housings WERI Header 2,54 mm SMT", Manufacturer="Wurth Elektronik", Manufacturer Part Number=61030621821, Supplier Part Number=710-61030621821, Price=1.8, Supplier=Mouser
J2 J3: library part CopperCon1, "WP-THRSH REDCUBE THR with external thread, M4 x 5mm, 85A", Manufacturer="Wurth Elektronik", Operating Temperature Max=150°C, Operating Temperature Min=-55°C, Rated Current=85A, Supplier Part Number=710-74651195R, Category="REDCUBE THR", ComponentLink1Description="Website Link", ComponentLink1URL=https://www.we-online.com/redexpert/article/74651194R?ad, ComponentLink2Description="Datasheet Link", ComponentLink2URL=https://www.we-online.com/redexpert/spec/74651194R?ad, Height=8.5mm, Length=10mm, Manufacturer Part Number=74651194R, Match Code=WP-THRSH, Material=Brass, Mount="Through Hole Reflow", Number of Pins=9, Packaging="Tape and Reel", Price=3.5, Supplier=Mouser, Surface=Tin, Thread Length=5mm, Thread Size=M4, Width=10mm
J5 J7: library part CopperCon2, "WP-THRSH REDCUBE THR with external thread, M4 x 5mm, 85A", Manufacturer="Wurth Elektronik", Operating Temperature Max=150°C, Operating Temperature Min=-55°C, Rated Current=85A, Supplier Part Number=710-74651195R, Category="REDCUBE THR", ComponentLink1Description="Website Link", ComponentLink1URL=https://www.we-online.com/redexpert/article/74651194R?ad, ComponentLink2Description="Datasheet Link", ComponentLink2URL=https://www.we-online.com/redexpert/spec/74651194R?ad, Height=8.5mm, Length=10mm, Manufacturer Part Number=74651194R, Match Code=WP-THRSH, Material=Brass, Mount="Through Hole Reflow", Number of Pins=9, Packaging="Tape and Reel", Price=3.5, Supplier=Mouser, Surface=Tin, Thread Length=5mm, Thread Size=M4, Width=10mm
J6: library part CopperCon3, "WP-THRSH REDCUBE THR with external thread, M4 x 5mm, 85A", Manufacturer="Wurth Elektronik", Operating Temperature Max=150°C, Operating Temperature Min=-55°C, Rated Current=85A, Supplier Part Number=710-74651195R, Category="REDCUBE THR", ComponentLink1Description="Website Link", ComponentLink1URL=https://www.we-online.com/redexpert/article/74651194R?ad, ComponentLink2Description="Datasheet Link", ComponentLink2URL=https://www.we-online.com/redexpert/spec/74651194R?ad, Height=8.5mm, Length=10mm, Manufacturer Part Number=74651194R, Match Code=WP-THRSH, Material=Brass, Mount="Through Hole Reflow", Number of Pins=9, Packaging="Tape and Reel", Price=3.5, Supplier=Mouser, Surface=Tin, Thread Length=5mm, Thread Size=M4, Width=10mm
J31 J32 J33: library part CopperBus, "WP-THRSH REDCUBE THR with external thread, M4 x 5mm, 85A", Manufacturer="Wurth Elektronik", Manufacturer Part Number=74651194R, Operating Temperature Max=150°C, Operating Temperature Min=-55°C, Rated Current=85A, Supplier Part Number=710-74651195R, Category="REDCUBE THR", ComponentLink1Description="Website Link", ComponentLink1URL=https://www.we-online.com/redexpert/article/74651194R?ad, ComponentLink2Description="Datasheet Link", ComponentLink2URL=https://www.we-online.com/redexpert/spec/74651194R?ad, Height=8.5mm, Length=10mm, Match Code=WP-THRSH, Material=Brass, Mount="Through Hole Reflow", Number of Pins=9, Packaging="Tape and Reel", Price=3.5, Supplier=Mouser, Surface=Tin, Thread Length=5mm, Thread Size=M4, Width=10mm
Q1 Q2 Q3 Q4 Q5 Q6 Q7 Q8 Q9 Q10 Q11 Q12 Q13 Q14 Q15 Q16 Q17 Q18 Q19 Q20 Q21 Q22 Q23 Q24: "MOSFET Single N-Channel Power MOSFET 100V, 236A, 2.0mohm", Manufacturer=Onsemi, Manufacturer Part Number=NTMTSC002N10MCTXG, Supplier Part Number=863-TMTSC002N10MCTXG, Price=5.9, Supplier=Mouser
R2 R3 R6 R11 R14 R25 R26 R28 R33 R35 R46 R47 R49 R54 R56: library part CSS2H-3920R-L500FE, "Current Sense Resistors - SMD 0.5mOHMS 9W 1% AEC-Q200", Manufacturer=Bourns, Supplier Part Number=652-CSS2H3920RL500FE, Manufacturer Part Number=CSS2H-3920R-L500FE, Price=2, Supplier=Mouser

## Via types
v1: diameter 0.8, hole 0.4, Top Layer to Bottom Layer, tented both sides, 2185 vias

## Nets (pads, with @x,y where several pads share a name; then routed paths per layer and width w, separated by ;. In a path a pad name is that pad's centre, name@x,y a point inside that pad or via, vN(x,y) a via of type N, cw(c..) or ccw(c..) an arc to the next point about the centre after c; other vN are vias at no path point)
GND: C3.1 C4.1 C5.1 C9.2 C10.2 C11.2 C21.1 C22.1 C23.1 C27.2 C28.2 C29.2 C41.1 C42.1 C43.1 C48.2 C49.2 C50.2 J3.1 J22.1 J22.2 J22.3 J22.4 J22.5 J22.6 Q5.SOURCE Q6.SOURCE Q7.SOURCE Q8.SOURCE Q13.SOURCE Q14.SOURCE Q15.SOURCE Q16.SOURCE Q21.SOURCE Q22.SOURCE Q23.SOURCE Q24.SOURCE
  other v1: 19.1,4.5 20.6,4.5 22.1,4.5 23.6,4.5 25.1,4.5 26.6,4.5 28.1,4.5 37.9,4.5 39.4,4.5 40.9,4.5 42.4,4.5 43.9,4.5 45.4,4.5 46.9,4.5 48.4,4.5 49.9,4.5 51.4,4.5 52.9,4.5 54.4,4.5 55.9,4.5 57.4,4.5 58.9,4.5 60.4,4.5 61.9,4.5 63.4,4.5 64.9,4.5 66.4,4.5 67.9,4.5 77.9,4.5 79.4,4.5 80.9,4.5 82.4,4.5 83.9,4.5 85.4,4.5 86.9,4.5 19.1,6 20.6,6 22.1,6 23.6,6 25.1,6 26.6,6 28.1,6 37.9,6 39.4,6 40.9,6 42.4,6 43.9,6 45.4,6 46.9,6 48.4,6 49.9,6 51.4,6 52.9,6 54.4,6 55.9,6 57.4,6 58.9,6 60.4,6 61.9,6 63.4,6 64.9,6 66.4,6 67.9,6 77.9,6 79.4,6 80.9,6 82.4,6 83.9,6 85.4,6 86.9,6 19.1,7.5 20.6,7.5 22.1,7.5 23.6,7.5 25.1,7.5 26.6,7.5 28.1,7.5 37.9,7.5 39.4,7.5 40.9,7.5 42.4,7.5 43.9,7.5 45.4,7.5 46.9,7.5 48.4,7.5 49.9,7.5 51.4,7.5 52.9,7.5 54.4,7.5 55.9,7.5 57.4,7.5 58.9,7.5 60.4,7.5 61.9,7.5 63.4,7.5 64.9,7.5 66.4,7.5 67.9,7.5 77.9,7.5 79.4,7.5 80.9,7.5 82.4,7.5 83.9,7.5 85.4,7.5 86.9,7.5 19.1,9 20.6,9 22.1,9 23.6,9 25.1,9 26.6,9 28.1,9 37.9,9 39.4,9 40.9,9 42.4,9 43.9,9 45.4,9 46.9,9 48.4,9 49.9,9 51.4,9 52.9,9 54.4,9 55.9,9 57.4,9 58.9,9 60.4,9 61.9,9 63.4,9 64.9,9 66.4,9 67.9,9 77.9,9 79.4,9 80.9,9 82.4,9 83.9,9 85.4,9 86.9,9 19.267,38.732 20.767,38.732 19.267,40.232 20.767,40.232 19.267,41.732 20.767,41.732 19.3,59.7 20.8,59.7 19.3,61.2 20.8,61.2 19.3,62.7 20.8,62.7 19,92.7 20.5,92.7 22,92.7 23.5,92.7 25,92.7 26.5,92.7 28,92.7 38,92.7 39.5,92.7 41,92.7 42.5,92.7 44,92.7 45.5,92.7 47,92.7 48.5,92.7 50,92.7 51.5,92.7 53,92.7 54.5,92.7 56,92.7 57.5,92.7 59,92.7 60.5,92.7 62,92.7 63.5,92.7 65,92.7 66.5,92.7 68,92.7 77.8,92.7 79.3,92.7 80.8,92.7 82.3,92.7 83.8,92.7 85.3,92.7 86.8,92.7 19,94.2 20.5,94.2 22,94.2 23.5,94.2 25,94.2 26.5,94.2 28,94.2 38,94.2 39.5,94.2 41,94.2 42.5,94.2 44,94.2 45.5,94.2 47,94.2 48.5,94.2 50,94.2 51.5,94.2 53,94.2 54.5,94.2 56,94.2 57.5,94.2 59,94.2 60.5,94.2 62,94.2 63.5,94.2 65,94.2 66.5,94.2 68,94.2 77.8,94.2 79.3,94.2 80.8,94.2 82.3,94.2 83.8,94.2 85.3,94.2 86.8,94.2 19,95.7 20.5,95.7 22,95.7 23.5,95.7 25,95.7 26.5,95.7 28,95.7 38,95.7 39.5,95.7 41,95.7 42.5,95.7 44,95.7 45.5,95.7 47,95.7 48.5,95.7 50,95.7 51.5,95.7 53,95.7 54.5,95.7 56,95.7 57.5,95.7 59,95.7 60.5,95.7 62,95.7 63.5,95.7 65,95.7 66.5,95.7 68,95.7 77.8,95.7 79.3,95.7 80.8,95.7 82.3,95.7 83.8,95.7 85.3,95.7 86.8,95.7 19,97.2 20.5,97.2 22,97.2 23.5,97.2 25,97.2 26.5,97.2 28,97.2 38,97.2 39.5,97.2 41,97.2 42.5,97.2 44,97.2 45.5,97.2 47,97.2 48.5,97.2 50,97.2 51.5,97.2 53,97.2 54.5,97.2 56,97.2 57.5,97.2 59,97.2 60.5,97.2 62,97.2 63.5,97.2 65,97.2 66.5,97.2 68,97.2 77.8,97.2 79.3,97.2 80.8,97.2 82.3,97.2 83.8,97.2 85.3,97.2 86.8,97.2 17.768,126.978 19.268,126.978 20.768,126.978 17.768,128.478 19.268,128.478 20.768,128.478 17.788,130.034 19.288,130.034 20.788,130.034 17.788,131.534 19.288,131.534 20.788,131.534
OUT_U: J1.5 J5.1 R2.1 R3.1 R6.1 R11.1 R14.1 | length 81.9
  Top Layer w0.75: J1.5@14.8,114.46 14.925,114.335 14.925,113.539 15.364,113.1 v1(20.7,113.1)
  Signal Layer 1 w0.75: v1(20.7,113.1) 20.7,104.4 22,103.1 64.2,103.1 67.2,100.1 81.8,100.1 83.19,101.49 83.19,102.89 v1(83.2,102.9)
  other v1: 80.2,102.9 81.7,102.9 95.2,102.9 96.7,102.9 98.2,102.9 99.7,102.9 101.2,102.9 102.7,102.9 80.2,104.4 81.7,104.4 83.2,104.4 95.2,104.4 96.7,104.4 98.2,104.4 99.7,104.4 101.2,104.4 102.7,104.4 80.2,105.9 81.7,105.9 83.2,105.9 95.2,105.9 96.7,105.9 98.2,105.9 99.7,105.9 101.2,105.9 102.7,105.9 80.2,107.4 81.7,107.4 83.2,107.4 84.7,107.4 93.7,107.4 95.2,107.4 96.7,107.4 98.2,107.4 99.7,107.4 101.2,107.4 102.7,107.4 80.2,108.9 81.7,108.9 83.2,108.9 84.7,108.9 86.2,108.9 89.2,108.9 92.2,108.9 93.7,108.9 95.2,108.9 96.7,108.9 98.2,108.9 99.7,108.9 101.2,108.9 102.7,108.9 80.2,110.4 81.7,110.4 83.2,110.4 84.7,110.4 86.2,110.4 87.7,110.4 89.2,110.4 90.7,110.4 92.2,110.4 93.7,110.4 95.2,110.4 96.7,110.4 98.2,110.4 99.7,110.4 101.2,110.4 102.7,110.4 80.2,111.9 81.7,111.9 83.2,111.9 84.7,111.9 86.2,111.9 87.7,111.9 89.2,111.9 90.7,111.9 92.2,111.9 93.7,111.9 95.2,111.9 96.7,111.9 98.2,111.9 99.7,111.9 101.2,111.9 102.7,111.9 80.2,113.4 81.7,113.4 83.2,113.4 84.7,113.4 86.2,113.4 87.7,113.4 89.2,113.4 90.7,113.4 92.2,113.4 93.7,113.4 95.2,113.4 96.7,113.4 98.2,113.4 99.7,113.4 101.2,113.4 102.7,113.4 80.2,114.9 81.7,114.9 83.2,114.9 84.7,114.9 86.2,114.9 87.7,114.9 89.2,114.9 90.7,114.9 92.2,114.9 93.7,114.9 95.2,114.9 96.7,114.9 98.2,114.9 99.7,114.9 101.2,114.9 102.7,114.9 80.2,116.4 81.7,116.4 83.2,116.4 84.7,116.4 92.2,116.4 93.7,116.4 95.2,116.4 96.7,116.4 98.2,116.4 99.7,116.4 101.2,116.4 102.7,116.4 80.2,117.9 81.7,117.9 83.2,117.9 93.7,117.9 95.2,117.9 96.7,117.9 98.2,117.9 99.7,117.9 101.2,117.9 102.7,117.9 80.2,119.4 81.7,119.4 83.2,119.4 95.2,119.4 96.7,119.4 98.2,119.4 99.7,119.4 101.2,119.4 102.7,119.4 80.2,120.9 81.7,120.9 83.2,120.9 95.2,120.9 96.7,120.9 98.2,120.9 99.7,120.9 101.2,120.9 102.7,120.9 80.2,122.4 81.7,122.4 83.2,122.4 93.7,122.4 95.2,122.4 96.7,122.4 98.2,122.4 99.7,122.4 101.2,122.4 102.7,122.4 80.2,123.9 81.7,123.9 83.2,123.9 80.2,125.4 81.7,125.4 83.2,125.4 80.2,126.9 81.7,126.9 83.2,126.9 80.2,128.4 81.7,128.4 83.2,128.4 80.2,129.9 81.7,129.9 83.2,129.9 80.2,131.4 81.7,131.4 83.2,131.4
OUT_V: J4.5 J6.1 R25.1 R26.1 R28.1 R33.1 R35.1 | length 81.6
  Top Layer w0.75: v1(14.4,69.3) 14.4,70.46
  Signal Layer 1 w0.75: v1(14.4,69.3) 15.8,69.3 20,65.1 65.9,65.1 66.9,64.1 66.9,57.6 68,56.5 81.99,56.5 83.4,57.91 83.4,59.7
  other v1: 80.7,58.7 82.2,58.7 83.7,58.7 85.2,58.7 86.7,58.7 88.2,58.7 89.7,58.7 91.2,58.7 80.7,60.2 82.2,60.2 83.7,60.2 85.2,60.2 86.7,60.2 88.2,60.2 89.7,60.2 91.2,60.2 80.7,61.7 82.2,61.7 83.7,61.7 85.2,61.7 80.7,63.2 82.2,63.2 83.7,63.2 80.7,64.7 82.2,64.7 83.7,64.7 80.7,66.2 82.2,66.2 83.7,66.2 80.7,67.7 82.2,67.7 83.7,67.7 80.7,69.2 82.2,69.2 83.7,69.2 85.2,69.2 80.7,70.7 82.2,70.7 83.7,70.7 85.2,70.7 86.7,70.7 88.2,70.7 89.7,70.7 91.2,70.7 80.7,72.2 82.2,72.2 83.7,72.2 85.2,72.2 86.7,72.2 88.2,72.2 89.7,72.2 91.2,72.2 80.7,73.7 82.2,73.7 83.7,73.7 85.2,73.7 86.7,73.7 88.2,73.7 89.7,73.7 91.2,73.7 80.7,75.2 82.2,75.2 83.7,75.2 85.2,75.2 86.7,75.2 88.2,75.2 89.7,75.2 91.2,75.2 80.7,76.7 82.2,76.7 83.7,76.7 85.2,76.7 80.7,78.2 82.2,78.2 83.7,78.2 80.7,79.7 82.2,79.7 83.7,79.7 80.7,81.2 82.2,81.2 83.7,81.2 80.7,82.7 82.2,82.7 83.7,82.7 80.7,84.2 82.2,84.2 83.7,84.2 85.2,84.2 80.7,85.7 82.2,85.7 83.7,85.7 85.2,85.7 86.7,85.7 91.2,85.7 80.7,87.2 82.2,87.2 83.7,87.2 85.2,87.2 86.7,87.2 88.2,87.2 89.7,87.2 91.2,87.2
OUT_W: J7.1 J9.5 R46.1 R47.1 R49.1 R54.1 R56.1 | length 84.5
  Top Layer w0.5: R47.1@81.7,21.8 82.6,22.7 v1(82.6,23.4)
  Top Layer w0.75: J9.5@14.154,26 16.425,26 17.415,25.01 17.415,24.41 v1(17.425,24.4)
  Signal Layer 1 w0.75: v1(17.425,24.4) 17.425,13.875 19.3,12 81.3,12 82.6,13.3 v1(82.6,14.4) ; v1@82.4,15.8 v1@82.5,15.9
  other v1: 81.1,14.4 81.1,15.9 82.6,15.9 81.1,17.4 82.6,17.4 81.1,18.9 82.6,18.9 81.1,20.4 82.6,20.4 81.1,21.9 82.6,21.9 81.1,23.4 84.1,23.4 81.1,24.9 82.6,24.9 84.1,24.9 81.1,26.4 82.6,26.4 84.1,26.4 81.1,27.9 82.6,27.9 84.1,27.9 81.1,29.4 82.6,29.4 84.1,29.4 85.6,29.4 81.1,30.9 82.6,30.9 84.1,30.9 85.6,30.9 87.1,30.9 88.6,30.9 90.1,30.9 91.6,30.9 81.1,32.4 82.6,32.4 84.1,32.4 85.6,32.4 87.1,32.4 88.6,32.4 90.1,32.4 91.6,32.4 81.1,33.9 82.6,33.9 84.1,33.9 85.6,33.9 87.1,33.9 88.6,33.9 90.1,33.9 91.6,33.9 81.1,35.4 82.6,35.4 84.1,35.4 85.6,35.4 87.1,35.4 88.6,35.4 90.1,35.4 91.6,35.4 81.1,36.9 82.6,36.9 84.1,36.9 85.6,36.9 81.1,38.4 82.6,38.4 84.1,38.4 81.1,39.9 82.6,39.9 84.1,39.9 81.1,41.4 82.6,41.4 84.1,41.4 81.1,42.9 82.6,42.9 84.1,42.9